# EAGLE board MSGEQ7 (EAGLE 7.2.0)
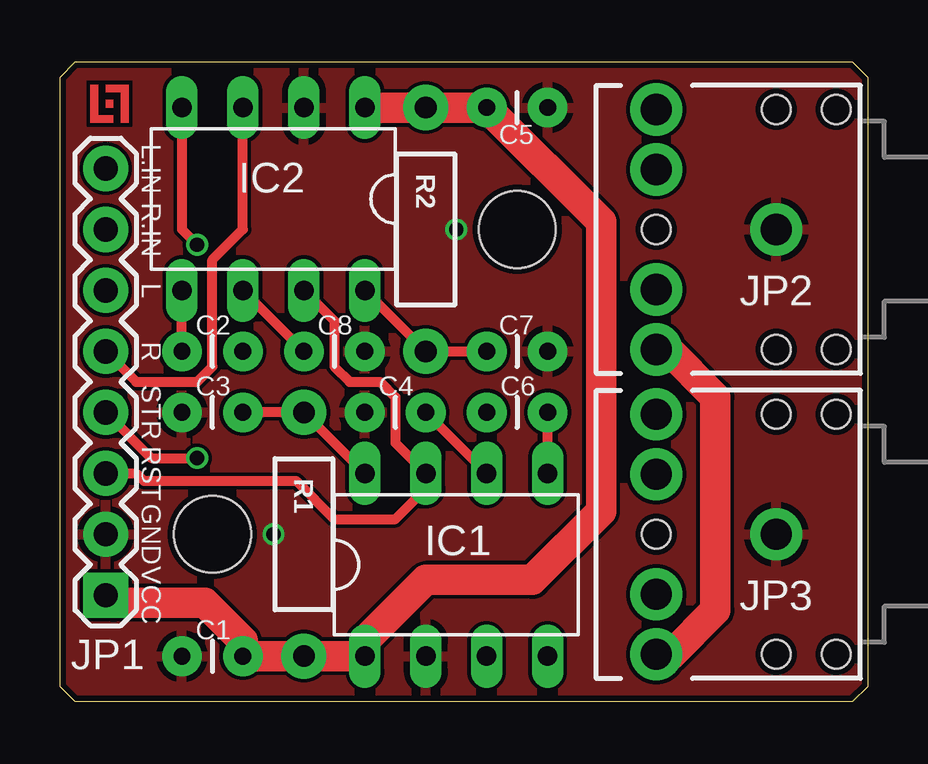
[diagram p0: board, top side]
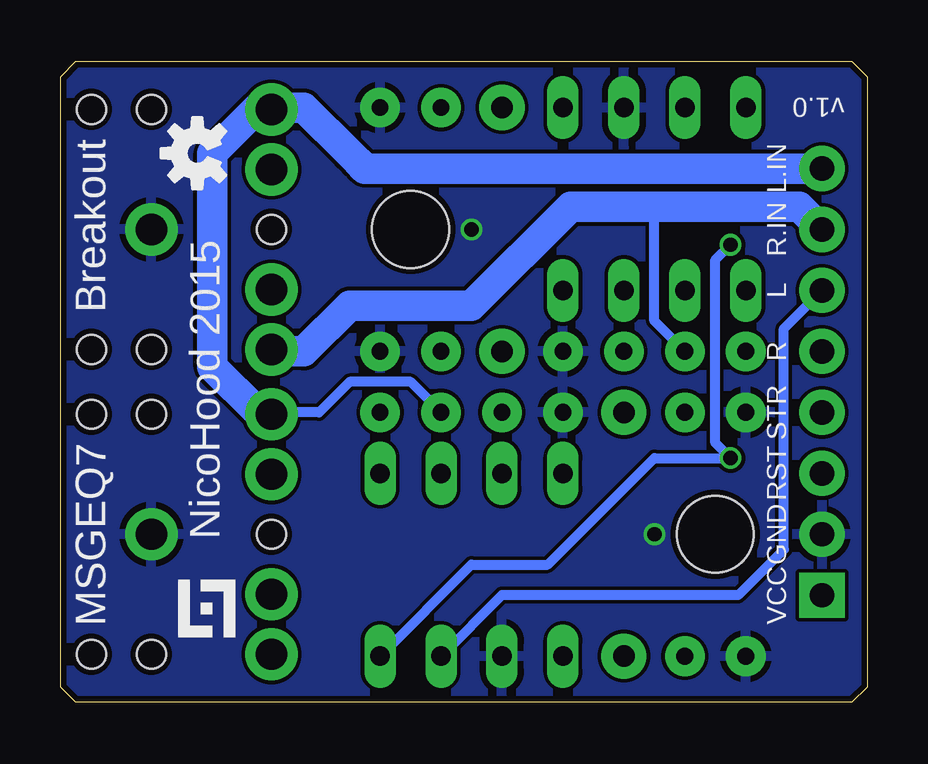
[diagram p1: board, bottom side, seen from below]

Size 33.66 x 26.67 mm. Coordinates in mm from the lower left corner, seen from the top.
Outline: 0,0.64 0,26.04 0.64,26.67 33.02,26.67 33.66,26.04 33.66,0.64 33.02,0 0.64,0 0,0.64
Copper layers (1*16): Top 0.035mm / dielectric 1.5mm / Bottom 0.035mm
Design rules "Elecrow_2-layer_eagle_rule": minimum track width 6mil, minimum drill 12mil, track to track 6mil, track to pad 6mil, pad to pad 6mil, via to via 6mil, smd to smd 0mil, copper to edge 10mil, drill to drill 10mil, minimum pad ring 10mil, minimum via ring 6mil, stop-mask expansion 2mil, vias tented up to drill 100mil, thermal gap 10mil
Holes 3.2 mm at 6.35,6.99 19.05,19.68
tRestrict: area 1.1,25.7 to 3,25.9; area 2.9,25.4 to 3,25.7; area 1.1,24 to 1.3,25.7; area 1.3,24 to 3,24.1; area 2.9,24.1 to 3,25.6; area 1.6,24.4 to 1.9,25.7; area 2.2,24.1 to 2.5,25.4; area 1.9,25.1 to 2.2,25.4; area 1.9,24.4 to 2.2,24.8

## Footprints (pad centres in the part's own frame; a part is rotated, then mirrored left to right if it is on the bottom)
CAP-PTH-SMALL = drill 0.7 pad 1.651: 1 0,0; 2 2.54,0
DIL-08 = drill 0.813 long: 1 -3.81,-3.81; 2 -1.27,-3.81; 3 1.27,-3.81; 4 3.81,-3.81; 5 3.81,3.81; 6 1.27,3.81; 7 -1.27,3.81; 8 -3.81,3.81
1X08 = drill 1.016 pad 1.88 square: 1 0,0 | drill 1.016 pad 1.88: 2 2.54,0; 3 5.08,0; 4 7.62,0; 5 10.16,0; 6 12.7,0; 7 15.24,0; 8 17.78,0
AUDIO-JACK = drill 1.3 pad 2.184: RING 5,5; RSH 5,2.5; SLEEVE 0,0; TIP 5,-5; TSH 5,-2.5 | hole 1.2: 0,5; -2.5,5; -2.5,-5; 0,-5; 5,0
AXIAL-0.4 = drill 0.9 pad 1.88: P$1 -5.08,0; P$2 5.08,0

## Placement (x,y rotation side)
C1  100nF  [CAP-PTH-SMALL]  5.08,1.91 0 top
C2  10nF  [CAP-PTH-SMALL]  7.62,14.61 180 top
C3  33pF  [CAP-PTH-SMALL]  7.62,12.06 180 top
C4  100nF  [CAP-PTH-SMALL]  15.24,12.06 180 top
C5  100nF  [CAP-PTH-SMALL]  20.32,24.77 180 top
C6  10nF  [CAP-PTH-SMALL]  17.78,12.06 0 top
C7  33pF  [CAP-PTH-SMALL]  17.78,14.61 0 top
C8  100nF  [CAP-PTH-SMALL]  10.16,14.61 0 top
IC1  MSGEQ7DIL  [DIL-08]  16.51,5.71 0 top
IC2  MSGEQ7DIL  [DIL-08]  8.89,20.95 180 top
JP1  [1X08]  1.91,4.45 90 top
JP2  [AUDIO-JACK]  29.84,19.68 180 top
JP3  [AUDIO-JACK]  29.84,6.99 180 top
LOGO1  OSHW-LOGOS  [OSHW-LOGO-S]  27.94,22.86 270 top
R1  200k  [AXIAL-0.4]  10.16,6.99 90 top
R2  200k  [AXIAL-0.4]  15.24,19.68 270 top

## Library data of the parts
C1-C8 = SparkFun-Capacitors
IC1 IC2 = SparkFun-AnalogIC
JP1 = SparkFun-Connectors; PROD_ID: CONN-08438
JP2 JP3 = SparkFun-Connectors
LOGO1 = SparkFun-Aesthetics
R1 R2 = SparkFun-Passives

## Nets
AUDIO_LEFT: C6.1 JP1.8 JP2.TIP JP3.TIP
AUDIO_RIGHT: C2.1 JP1.7 JP2.RING JP3.RING
GND: C1.1 C3.2 C4.2 C5.1 C7.2 C8.2 IC1.2 IC2.2 JP1.2 JP2.SLEEVE JP3.SLEEVE
IN_LEFT: C6.2 IC1.5
IN_RIGHT: C2.2 IC2.5
N$9: C8.1 IC2.6
N$10: C7.1 IC2.8 R2.P$2
N$11: C3.1 IC1.8 R1.P$2
N$12: C4.1 IC1.6
OUT_LEFT: IC1.3 JP1.6
OUT_RIGHT: IC2.3 JP1.5
RESET: IC1.7 IC2.7 JP1.3
STROBE: IC1.4 IC2.4 JP1.4
VCC: C1.2 C5.2 IC1.1 IC2.1 JP1.1 R1.P$1 R2.P$1

## Tracks (layer width: path | path; a pad name or v marks a point on that pad's centre or on a via)
AUDIO_LEFT
  Bottom 0.406: C6.1 19.05,13.34 21.59,13.34 22.86,12.06 24.77,12.06 JP3.TIP
  Bottom 1.27: JP3.TIP 24.93,12.06 25.4,12.06 27.3,13.97 27.3,22.86 25.48,24.68 JP2.TIP 24.77,24.77 23.5,24.77 21.59,22.86 21.27,22.54 20.95,22.23 JP1.8
AUDIO_RIGHT
  Top 1.27: JP3.RING 25.48,1.99 27.3,3.81 27.3,12.7 25.32,14.69 JP2.RING
  Bottom 0.406: C2.1 8.89,15.88 8.89,20.64
  Bottom 1.27: JP2.RING 24.77,14.61 23.5,14.61 21.59,16.51 16.51,16.51 12.38,20.64 8.89,20.64 2.86,20.64 JP1.7
GND  (via drill 0.6)
  other vias: 16.51,19.68 8.89,6.99
  pour Bottom: 0,26.04 0.64,26.67 33.02,26.67 33.66,26.04 33.66,0.64 33.02,0 0.64,0 0,0.64
  pour Top: 0,26.04 0,0.95 0,0.64 0.64,0 33.02,0 33.66,0.64 33.66,26.04 33.02,26.67 0.64,26.67
IN_LEFT
  Top 0.406: IC1.5 C6.2
IN_RIGHT
  Top 0.406: C2.2 IC2.5
N$9
  Top 0.406: C8.1 IC2.6
N$10
  Top 0.406: IC2.8 R2.P$2 C7.1
N$11
  Top 0.406: IC1.8 R1.P$2 C3.1
N$12
  Top 0.406: IC1.6 C4.1
OUT_LEFT
  Bottom 0.406: IC1.3 15.24,4.45 5.4,4.45 3.49,6.35 3.49,15.56 JP1.6
OUT_RIGHT
  Top 0.406: JP1.5 3.17,13.34 5.71,13.34 6.35,13.97 6.35,18.41 7.62,19.68 IC2.3
RESET
  Top 0.406: IC2.7 11.43,15.88 11.43,13.97 12.06,13.34 13.34,13.34 13.97,12.7 13.97,10.79 IC1.7 15.24,8.89 13.97,7.62 11.43,7.62 9.84,9.21 3.49,9.21 3.17,9.53 JP1.3
STROBE  (via drill 0.6)
  Top 0.406: JP1.4 3.81,10.16 v5.71,10.16 | IC2.4 5.08,19.68 v5.71,19.05
  Bottom 0.406: IC1.4 16.51,5.71 13.34,5.71 8.89,10.16 v5.71,10.16 6.35,10.79 6.35,18.41 v5.71,19.05
VCC
  Top 1.27: IC2.1 R2.P$1 C5.2 22.54,20 22.54,7.94 19.68,5.08 15.24,5.08 12.7,2.54 IC1.1 R1.P$1 C1.2 7.62,2.54 6.03,4.13 2.22,4.13 JP1.1
(copper drawn outside any net)
  shapes: Top area x5

## Text on the board
tPlace: L.IN | R.IN | L | R | STR | RST | GND | VCC
bPlace: v1.0 | L.IN | R.IN | Breakout | L | R | NicoHood 2015 | STR | RST | GND | MSGEQ7 | VCC